# Allegro board METO_STM_CRY_V0_6.brd
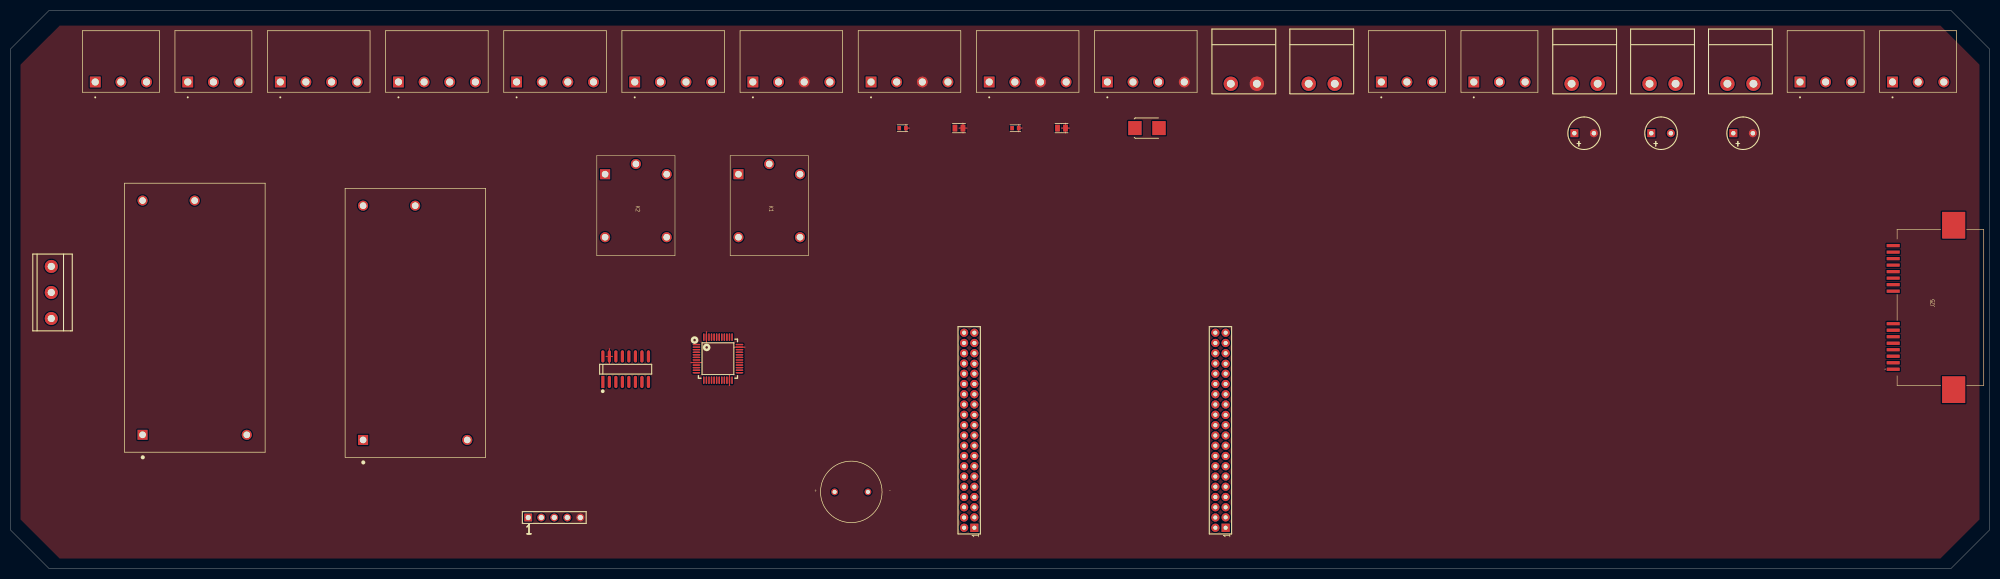
[diagram p0: board, top side]
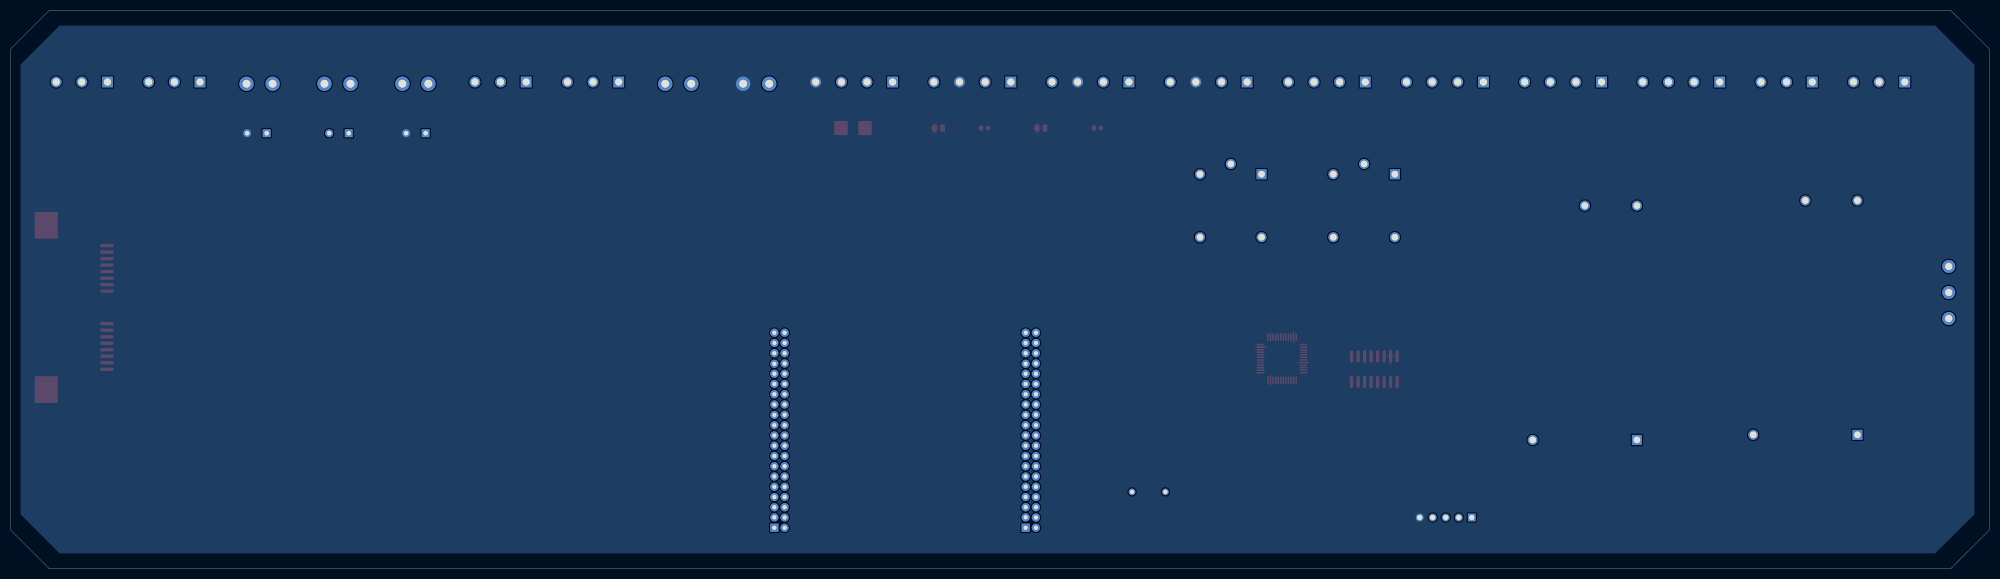
[diagram p1: board, bottom side, seen from below]

Outline 386 x 109 mm; copper layers: TOP, BOTTOM. Coordinates in mm from the lower left corner of the outline.
Outline path: 0,101.38 0,7.62 7.62,0 378.38,0 386,7.62 386,101.38 378.38,109 7.62,109 0,101.38

## Design rules (mm)
constraint set DEFAULT: min track width 0.203

## Placement (name value [footprint] x y rotation side)
C4  CAP POL  [CAPPOL2D250LS150034]  320 85 0 top
C5  CAP POL  [CAPPOL2D250LS150034]  336 85 0 top
C6  CAP POL  [CAPPOL2D250LS150034]  305 85 0 top
C29  10u/6V3/CER  [SMC0805]  185 86 0 top
C30  100n  [SMC0603]  196 86 0 top
C31  10u/6V3/CER  [SMC0805]  205 86 0 top
C32  100n  [SMC0603]  174 86 0 top
D2  MBRA340T3  [SMDO214AA21]  224 86 0 top
J1  CON40  [HEADER_2MM_2X20]  188 8 90 top
J2  CON40  [HEADER_2MM_2X20]  237 8 90 top
J3  282811-4  [TE_282811-4]  60.15 95 0 top
J4  282811-4  [TE_282811-4]  83.19 95 0 top
J5  282811-4  [TE_282811-4]  106.23 95 0 top
J6  282811-4  [TE_282811-4]  129.27 95 0 top
J7  282811-4  [TE_282811-4]  152.31 95 0 top
J8  282811-4  [TE_282811-4]  175.35 95 0 top
J9  282811-4  [TE_282811-4]  198.39 95 0 top
J10  282811-4  [TE_282811-4]  221.43 95 0 top
J11  282811-3  [TE_282811-3]  272.35 95 0 top
J12  282811-3  [TE_282811-3]  39.61 95 0 top
J13  282811-3  [TE_282811-3]  21.57 95 0 top
J14  282811-3  [TE_282811-3]  372.04 95 0 top
J16  CON2  [2LI_KLEMENS_200MILS]  336.8 94.66 0 top
J17  CON2  [2LI_KLEMENS_200MILS]  321.61 94.66 0 top
J18  CON2  [2LI_KLEMENS_200MILS]  351.99 94.66 0 top
J19  CON2  [2LI_KLEMENS_200MILS]  270.34 94.66 0 top
J20  CON2  [2LI_KLEMENS_200MILS]  255.15 94.66 0 top
J21  282811-3  [TE_282811-3]  290.39 95 0 top
J22  282811-3  [TE_282811-3]  354 95 0 top
J23  CON3  [3LU_KLEMENS]  8 59 270 top
J24  CON5  [CON5X140PROG]  101 10 0 top
J25  43841-0003  [438410003]  376 51 90 top
K1  JQC-3F-_T73_-1Z-12VDC  [JQC3FT731Z12VDC]  142 77 270 top
K2  JQC-3F-_T73_-1Z-12VDC  [JQC3FT731Z12VDC]  116 77 270 top
LS1  CCG-1206  [CUI_CCG-1206]  164 15 0 top
NOREF  -  []  154 77 90 top
NOREF#2  -  []  142 77 0 top
NOREF#3  -  []  128 77 90 top
NOREF#4  -  []  116 77 90 top
NOREF#5  -  []  142 64.7 0 top
NOREF#6  -  []  116 64.7 0 top
NOREF#7  -  []  116 77 0 top
NOREF#8  -  []  154 64.7 90 top
NOREF#9  -  []  128 64.7 90 top
NOREF#10  -  []  0 71.88 0 top
NOREF#11  -  []  142 77 90 top
PS1  RAC20-05SK  [CONV_RAC20-05SK]  36 49 90 top
PS2  RAC20-05SK  [CONV_RAC20-05SK]  79 48 90 top
U2  STM32L053C8T6  [QFP50P900X900X160-48N]  138 41 0 top
U14  ST3232CDR  [SOG05016WG244L400]  120 39 0 top

## Library data of the parts
C4-C6 = CAP POL
C29-C32 = CAPACITOR NON-POL
D2 = 1N5819M/CYL
J1 J2 = CON40
J3-J10 = 282811-4
J11-J14 J21 J22 = 282811-3
J16-J20 = CON2
J23 = CON3
J24 = CON5
J25 = 43841-0003
K1 K2 = JQC-3F-_T73_2
LS1 = CCG-1206: room: Buzzer
PS1 PS2 = RAC20-05SK
U2 = STM32L053C8T6
U14 = ICL232/SO_4: room: rs232

## Footprints (pads in the part's own frame, mm; a bottom-side part is the same pattern mirrored in y, then rotated)
2LI_KLEMENS_200MILS
  round 2.794 hole 1.524: 1(-17.145,0) 2(-12.065,0)
3LU_KLEMENS
  round 2.54 hole 1.397: 1(0,0) 2(5.08,0) 3(10.16,0)
438410003
  rect 0.64x2.54 smd: 1(-12.065,8.835) 2(-10.795,8.835) 3(-9.525,8.835) 4(-8.255,8.835) 5(-6.985,8.835) 6(-5.715,8.835) 7(-4.445,8.835) 8(-3.175,8.835) 9(3.175,8.835) 10(4.445,8.835) 11(5.715,8.835) 12(6.985,8.835) 13(8.255,8.835) 14(9.525,8.835) 15(10.795,8.835) 16(12.065,8.835)
  rect 5.21x4.52 smd: MP1(-16.05,-2.96) MP2(16.05,-2.96)
CAPPOL2D250LS150034
  rect 1.549x1.549 hole 0.864: 1(0,0)
  round 1.549 hole 0.864: 2(3.81,0)
CON5X140PROG
  rect 1.524x1.524 hole 1.016: 1(0,0)
  round 1.524 hole 1.016: 2(2.54,0) 3(5.08,0) 4(7.62,0) 5(10.16,0)
CONV_RAC20-05SK
  rect 1.95x1.95 hole 1.3: 1(-22.86,10.2)
  round 1.95 hole 1.3: 2(-22.86,-10.12) 4(22.86,0.04) 5(22.86,10.2)
CUI_CCG-1206
  round 1.308 hole 0.8: M(3.25,0) P(-3.25,0)
HEADER_2MM_2X20
  rect 1.6x1.6 hole 0.8: 1(0,0)
  round 1.6 hole 0.8: 2(0,2.002) 3(2.032,0) 4(2.002,2.002) 5(4.003,0) 6(4.003,2.002) 7(6.005,0) 8(6.005,2.002) 9(8.006,0) 10(8.006,2.002) 11(10.008,0) 12(10.008,2.002) 13(12.009,0) 14(12.009,2.002) 15(14.011,0) 16(14.011,2.002) 17(16.012,0) 18(16.012,2.002) 19(18.014,0) 20(18.014,2.002) 21(20.015,0) 22(20.015,2.002) 23(22.017,0) 24(22.052,2.002) 25(24.054,0) 26(24.054,2.002) 27(26.055,0) 28(26.055,2.002) 29(28.057,0) 30(28.057,2.002) 31(30.058,0) 32(30.058,2.002) 33(32.004,0) 34(32.06,2.002) 35(34.061,0) 36(34.061,2.002) 37(36.063,0) 38(36.063,2.002) 39(38.064,0) 40(38.064,2.002)
JQC3FT731Z12VDC
  rect 1.95x1.95 hole 1.3: 1(0,0)
  round 1.95 hole 1.3: 2(12.3,0) 3(12.3,12) 4(0,12) 5(-2,6)
QFP50P900X900X160-48N
  oval 1.5x0.3 smd: 1(-4.2,2.75) 2(-4.2,2.25) 3(-4.2,1.75) 4(-4.2,1.25) 5(-4.2,0.75) 6(-4.2,0.25) 7(-4.2,-0.25) 8(-4.2,-0.75) 9(-4.2,-1.25) 10(-4.2,-1.75) 11(-4.2,-2.25) 12(-4.2,-2.75) 25(4.2,-2.75) 26(4.2,-2.25) 27(4.2,-1.75) 28(4.2,-1.25) 29(4.2,-0.75) 30(4.2,-0.25) 31(4.2,0.25) 32(4.2,0.75) 33(4.2,1.25) 34(4.2,1.75) 35(4.2,2.25) 36(4.2,2.75)
  oval 0.3x1.5 smd: 13(-2.75,-4.2) 14(-2.25,-4.2) 15(-1.75,-4.2) 16(-1.25,-4.2) 17(-0.75,-4.2) 18(-0.25,-4.2) 19(0.25,-4.2) 20(0.75,-4.2) 21(1.25,-4.2) 22(1.75,-4.2) 23(2.25,-4.2) 24(2.75,-4.2) 37(2.75,4.2) 38(2.25,4.2) 39(1.75,4.2) 40(1.25,4.2) 41(0.75,4.2) 42(0.25,4.2) 43(-0.25,4.2) 44(-0.75,4.2) 45(-1.25,4.2) 46(-1.75,4.2) 47(-2.25,4.2) 48(-2.75,4.2)
SMC0603
  rect 0.711x0.838 smd: 1(-0.65,0) 2(0.65,0)
SMC0805
  rect 0.94x1.346 smd: 1(-0.78,0) 2(0.78,0)
SMDO214AA21
  rect 2.616x2.743 smd: 1(0,0) 2(-4.699,0)
SOG05016WG244L400
  rect 0.635x2.388 smd: 1(-4.445,-2.54)
  oval 0.635x2.388 smd: 2(-3.175,-2.54) 3(-1.905,-2.54) 4(-0.635,-2.54) 5(0.635,-2.54) 6(1.905,-2.54) 7(3.175,-2.54) 8(4.445,-2.54) 9(4.445,2.438) 10(3.175,2.438) 11(1.905,2.438) 12(0.635,2.438) 13(-0.635,2.438) 14(-1.905,2.438) 15(-3.175,2.438) 16(-4.445,2.438)
TE_282811-3
  rect 2.1x2.1 hole 1.4: 1(-5,0)
  round 2.1 hole 1.4: 2(0,0) 3(5,0)
TE_282811-4
  rect 2.1x2.1 hole 1.4: 1(-7.5,0)
  round 2.1 hole 1.4: 2(-2.5,0) 3(2.5,0) 4(7.5,0)

## Nets
3.3V: U14.16(VCC)
3.3V_UC: J24.1 U2.1 U2.9 U2.24 U2.36 U2.48
GND: C5.2 C6.2 C29.2 C30.2 C31.2 C32.2 J7.3 J8.3 J9.3 J10.4 J20.2 J24.5 U2.8 U2.23 U2.35 U2.47(VSS__2) U14.15
VBAT_ADC_CON: U2.11
220_AC_N: J23.1 PS1.2 PS2.2
220_AC_P: J23.3 PS1.1(VAC_IN(N)) PS2.1(VAC_IN(N))
ADC_IN: U2.10
CON_A_PIN_1: J1.1
CON_A_PIN_2: J1.2
CON_A_PIN_3: J1.3
CON_A_PIN_4: J1.4
CON_A_PIN_5: J1.5
CON_A_PIN_6: J1.6
CON_A_PIN_7: J1.7
CON_A_PIN_8: J1.8
CON_A_PIN_9: J1.9
CON_A_PIN_10: J1.10
CON_A_PIN_11: J1.11
CON_A_PIN_12: J1.12
CON_A_PIN_13: J1.13
CON_A_PIN_14: J1.14
CON_A_PIN_15: J1.15
CON_A_PIN_16: J1.16
CON_A_PIN_17: J1.17
CON_A_PIN_18: J1.18
CON_A_PIN_19: J1.19
CON_A_PIN_20: J1.20
CON_A_PIN_21: J1.21
CON_A_PIN_22: J1.22
CON_A_PIN_23: J1.23
CON_A_PIN_24: J1.24
CON_A_PIN_25: J1.25
CON_A_PIN_26: J1.26
CON_A_PIN_27: J1.27
CON_A_PIN_28: J1.28
CON_A_PIN_29: J1.29
CON_A_PIN_30: J1.30
CON_A_PIN_31: J1.31
CON_A_PIN_32: J1.32
CON_A_PIN_33: J1.33
CON_A_PIN_34: J1.34
CON_A_PIN_35: J1.35
CON_A_PIN_36: J1.36
CON_A_PIN_37: J1.37
CON_A_PIN_38: J1.38
CON_A_PIN_39: J1.39
CON_A_PIN_40: J1.40
CON_B_PIN_1: J2.1
CON_B_PIN_2: J2.2
CON_B_PIN_3: J2.3
CON_B_PIN_4: J2.4
CON_B_PIN_5: J2.5
CON_B_PIN_6: J2.6
CON_B_PIN_7: J2.7
CON_B_PIN_8: J2.8
CON_B_PIN_9: J2.9
CON_B_PIN_10: J2.10
CON_B_PIN_11: J2.11
CON_B_PIN_12: J2.12
CON_B_PIN_13: J2.13
CON_B_PIN_14: J2.14
CON_B_PIN_15: J2.15
CON_B_PIN_16: J2.16
CON_B_PIN_17: J2.17
CON_B_PIN_18: J2.18
CON_B_PIN_19: J2.19
CON_B_PIN_20: J2.20
CON_B_PIN_21: J2.21
CON_B_PIN_22: J2.22
CON_B_PIN_23: J2.23
CON_B_PIN_24: J2.24
CON_B_PIN_25: J2.25
CON_B_PIN_26: J2.26
CON_B_PIN_27: J2.27
CON_B_PIN_28: J2.28
CON_B_PIN_29: J2.29
CON_B_PIN_30: J2.30
CON_B_PIN_31: J2.31
CON_B_PIN_32: J2.32
CON_B_PIN_33: J2.33
CON_B_PIN_34: J2.34
CON_B_PIN_35: J2.35
CON_B_PIN_36: J2.36
CON_B_PIN_37: J2.37
CON_B_PIN_38: J2.38
CON_B_PIN_39: J2.39
CON_B_PIN_40: J2.40
DBG_LED_1: U2.2
EMSTP_1: C4.1 J16.1
EMSTP_2: C4.2 J16.2
ENCODER_A: C6.1 J10.1
ENCODER_B: C5.1 J10.2
INPUT_PIN_1: U2.18
INPUT_PIN_2: U2.19
INPUT_PIN_3: U2.20
INPUT_PIN_4: U2.39
INPUT_PIN_5: U2.40
LCD_PWR_CON: U2.27
NRESET: J24.4 U2.7
PWR_5V: PS1.5
PWR_5V_EX: PS2.5
PWR_GND: PS1.4
PWR_GND_EX: PS2.4
RC45_RXD0: U14.9
RELAY1_VAC_1: J17.1
RELAY1_VAC_2: J17.2 K1.2
RELAY2_VAC_1: J18.1
RELAY2_VAC_2: J18.2 K2.2
RJ45_RXD1: U14.12
RJ45_TXD0: U14.10
RJ45_TXD1: U14.11
SELENOID_1_RESET: U2.16
SELENOID_1_SET: U2.33
SELENOID_2_RESET: U2.15
SELENOID_2_SET: U2.32
SELENOID_3_RESET: U2.14
SELENOID_3_SET: U2.29
SELENOID_4_RESET: U2.13
SELENOID_4_SET: U2.17
SELENOID_ENABLE: U2.38
SELENOID_SLEEP: U2.28
SENSOR_CON: U2.12
STEP_1_DIR: J7.2
STEP_1_EN: J7.4
STEP_1_STEP: J7.1
STEP_2_DIR: J8.2
STEP_2_EN: J8.4
STEP_2_STEP: J8.1
STEP_3_DIR: J9.2
STEP_3_EN: J9.4
STEP_3_STEP: J9.1
SWCLK: J24.2 U2.37
SWDIO: J24.3 U2.34
UC_SCL: U2.42
UC_SDA: U2.43
VDC_5V: C29.1 C30.1 D2.1 J10.3 J20.1
VRELAY1_VAC_1: K1.5
VRELAY2_VAC_1: K2.5
N395757: C31.1 C32.1 D2.2(CATHODE)
N410752: U2.44
N411240: U2.5
N411248: U2.4
N411278: U2.6
N411286: U2.3
N8883662: LS1.M
N8883700: LS1.P
N8972366: U14.14
N8972420: U14.13
N8972436: U14.4
N8972440: U14.1
N8972516: U14.5
N8972520: U14.3
N8972532: U14.6
N8972536: U14.2
N9011936: U14.7
N9011974: U14.8

Pads without a net: J3 1 2 3 4; J4 1 2 3 4; J5 1 2 3 4; J6 1 2 3 4; J11 1 2 3; J12 1 2 3; J13 1 2 3; J14 1 2 3; J19 1 2; J21 1 2 3; J22 1 2 3; J23 2; J25 1 2 3 4 5 6 7 8 9 10 11 12 13 14 15 16 MP1 MP2; K1 1 3 4; K2 1 3 4; U2 21 22 25 26 30 31 41 45 46

## Routing (per net, layer and track width the routed paths; a pad name or vN(x,y) marks a point on that pad's centre or on a via; arc(x,y) is an arc through that point)
GND: length 23.9
  TOP w0.203: C32.2 174.65,86.72 ; C32.2 175.31,86 ; C32.2 174.65,85.28 ; C31.2 206.55,86 ; C31.2 205,86 ; C31.2 205.78,85.02 ; C31.2 205.78,86.98 ; 141.14,43.25 U2.35 143.25,43.25 ; 185,86 C29.2 ; C29.2 186.55,86 ; C29.2 185.78,85.02 ; C29.2 185.78,86.98 ; U14.15 117.45,41.44 ; U14.15 116.2,41.44 ; U14.15 116.82,42.94 ; U14.15 116.82,39.94 ; 132.74,40.25 U2.8 134.85,40.25 ; 196.65,85.28 C30.2 ; C30.2 197.31,86 ; C30.2 196.65,86.72 ; 140.25,37.85 U2.23 140.25,35.75 ; 135.75,44.15 U2.47 135.75,46.25

## Copper pours and planes (outline as drawn; the poured copper is in the pictures)
GND on TOP: 9.62,2 376.38,2 384,9.62 384,98.38 376.38,106 9.62,106 2,98.38 2,9.62
GND on BOTTOM: 10.62,3 376.38,3 384,10.62 384,98.38 376.38,106 10.62,106 3,98.38 3,10.62
